# EAGLE board pcbdesign(li-poly) (EAGLE 9.3.2)
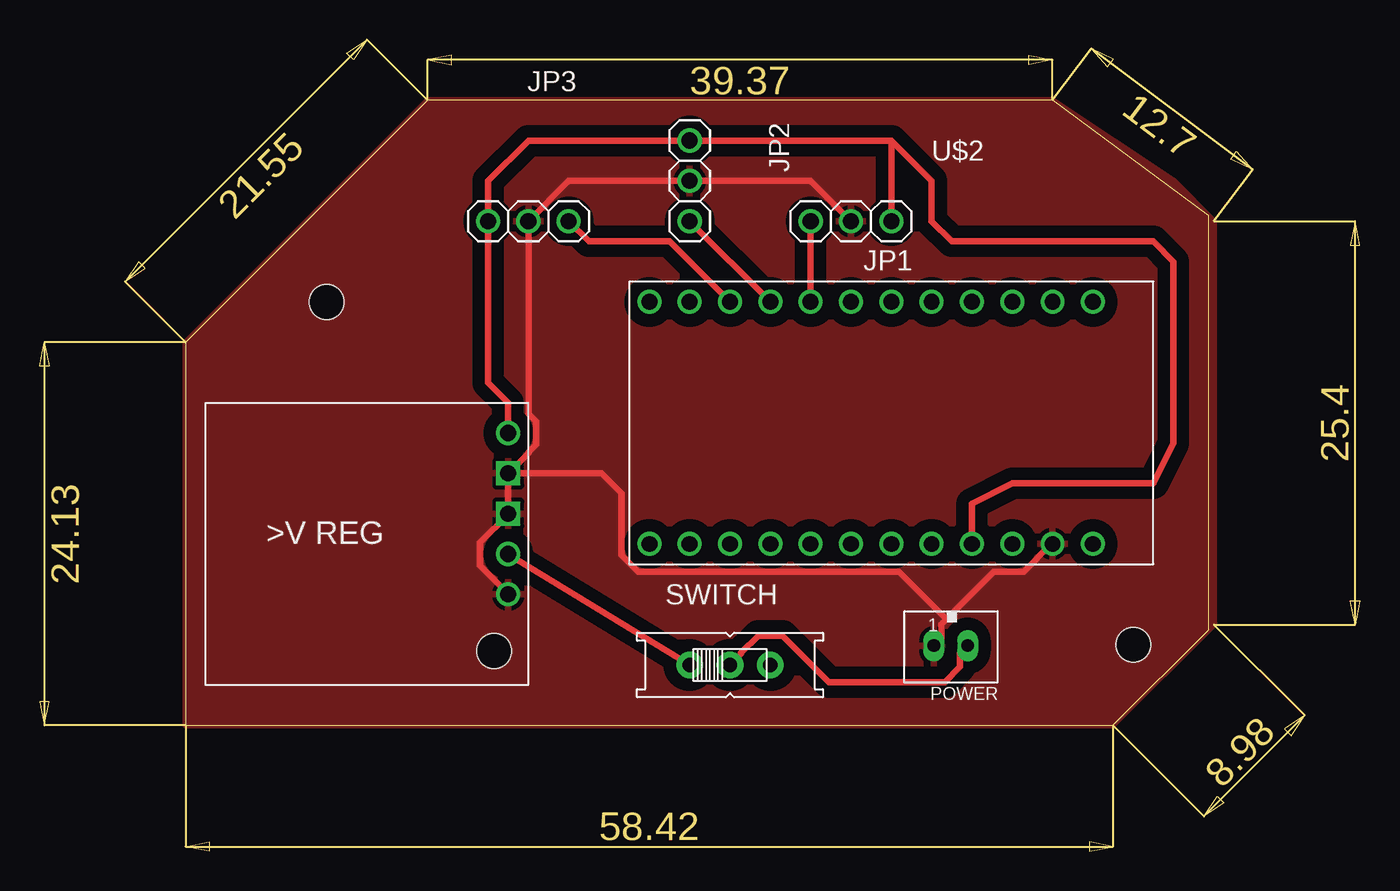
[diagram p0: board, top side]

Size 64.44 x 39.36 mm. Coordinates in mm from the lower left corner, seen from the top.
Outline: 0,0 58.42,0 64.44,6.02 64.44,32.08 54.62,39.36 15.23,39.36 0,24.13 0,0
Copper layers (1*16): Top 0.035mm / dielectric 1.5mm / Bottom 0.035mm
Design rules "MakerSpaceOthermillDRC_1_32": minimum track width 16mil, minimum drill 0.8mm, track to track 0.794003125mm, track to pad 0.794003125mm, pad to pad 0.794003125mm, via to via 0.794003125mm, smd to smd 0mil, copper to edge 0mil, drill to drill 1mil, minimum pad ring 10mil, minimum via ring 10mil, stop-mask expansion 1mil, vias tented up to drill 30mil, thermal gap 10mil
Net classes: 0 default: width 0.254 mm, drill 0.508 mm, clearance 0.254 mm
Holes 2.18 mm at 8.89,26.67 59.69,5.08

## Footprints (pad centres in the part's own frame; a part is rotated, then mirrored left to right if it is on the bottom)
1X03 = drill 1.016: 1 -2.54,0; 2 0,0; 3 2.54,0
JST_B2B-PH_HEADER = drill 0.8 long: P1 1.126,0.048; P2 -1.001,0.048
EG1218 = drill 0.9 pad 1.676: O -2.54,0; P 0,0; S 2.54,0
REG15D = drill 1.016: EN 5.715,1.27; VIN 8.255,1.27; VOUT 15.875,1.27 | drill 1.016 square: GND 10.795,1.27; GND1 13.335,1.27 | hole 2.184: 2.159,2.159
ARDUINO_PROMICRO = drill 1: 2 1.27,19.05; 3 1.27,16.51; 4 1.27,13.97; 5 1.27,11.43; 6 1.27,8.89; 7 1.27,6.35; 8 1.27,3.81; 9 1.27,1.27; 10 16.51,1.27; 14 16.51,6.35; 15 16.51,8.89; 16 16.51,3.81; A0 16.51,11.43; A1 16.51,13.97; A2 16.51,16.51; A3 16.51,19.05; GND 1.27,24.13; GND1 1.27,21.59; GND2 16.51,26.67; RAW 16.51,29.21; RST 16.51,24.13; RXI 1.27,26.67; TXO 1.27,29.21; VCC 16.51,21.59

## Placement (x,y rotation side)
JP1  [1X03]  41.91,31.75 180 top
JP2  [1X03]  31.75,34.29 270 top
JP3  [1X03]  21.59,31.75 0 top
POWER  JST-PH_2-PIN_HEADER  [JST_B2B-PH_HEADER]  48.26,5.08 180 top
SWITCH  [EG1218]  34.29,3.81 0 top
U$1  5ASTEP-DOWNVOLTAGEREGULATOR  [REG15D]  21.59,2.54 90 top
U$2  ARDUINO_PROMICRO  [ARDUINO_PROMICRO]  27.94,27.94 270 top

## Library data of the parts
JP1-JP3 SWITCH = adafruit
POWER = SRG
U$1 U$2 = oddWorld

## Nets
7.4V: POWER.P2 SWITCH.P
GND: JP1.2 JP2.2 JP3.2 POWER.P1 U$1.EN U$1.GND U$1.GND1 U$2.GND2
N$1: JP1.3 U$2.5
N$2: JP2.3 U$2.6
N$3: JP3.3 U$2.7
N$4: SWITCH.O U$1.VIN
VCC: JP1.1 JP2.1 JP3.1 U$1.VOUT U$2.VCC

## Tracks (layer width: path | path; a pad name or v marks a point on that pad's centre or on a via)
7.4V
  Top 0.406: SWITCH.P 34.99,4.51 34.99,4.57 36.07,5.64 37.59,5.64 40.51,2.73 47.82,2.73 48.78,3.69 48.78,4.56 POWER.P2
GND
  Top 0.406: POWER.P1 47.61,5.51 47.61,6.37 47.92,6.68 | U$2.GND2 54.55,11.43 52.8,9.68 50.92,9.68 47.92,6.68 | U$1.EN 20.32,8.31 18.56,10.07 18.56,11.52 20.32,13.28 U$1.GND U$1.GND1 | 47.92,6.68 44.93,9.68 28.48,9.68 27.46,10.71 27.46,14.62 26.21,15.88 U$1.GND1 | U$1.GND1 21.59,17.14 21.59,17.2 22.08,17.69 22.08,19.14 21.59,19.63 JP3.2 24.13,34.29 JP2.2 39.37,34.29 JP1.2
  pour Top: 0,24.13 15.24,39.37 54.61,39.37 62.26,34.26 64.77,31.75 64.77,6.35 58.42,0 0,0
N$1
  Top 0.406: JP1.3 U$2.5
N$2
  Top 0.406: JP2.3 U$2.6
N$3
  Top 0.406: JP3.3 25.4,30.48 30.48,30.48 U$2.7
N$4
  Top 0.406: SWITCH.O U$1.VIN
VCC
  Top 0.406: 44.45,36.83 46.99,34.29 46.99,31.75 48.26,30.48 60.96,30.48 62.23,29.21 62.23,17.78 60.96,15.24 52.07,15.24 49.53,13.97 U$2.VCC | JP1.1 44.45,36.83 | U$1.VOUT 20.32,20.32 19.05,21.59 JP3.1 19.05,34.29 21.59,36.83 JP2.1 44.45,36.83

## Text on the board
tPlace: >V REG